# Altium PCB ChargeContactBoard.PcbDoc
Units mil, origin at the board's own origin, x right, y up, seen from the top; angles counter-clockwise.
Board outline 464.57 x 1370.12 mil, 2 copper layers (Top Layer, Bottom Layer); 2 components, 2 nets, 7 pads, 2 vias.
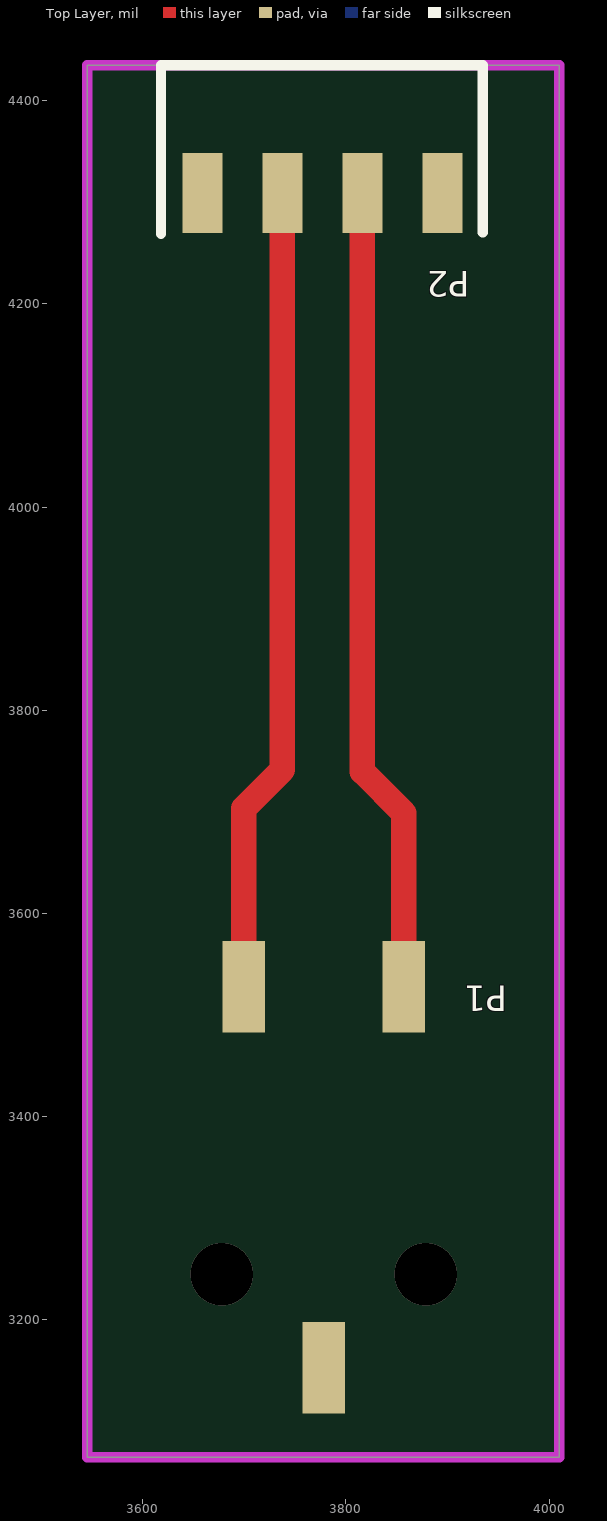
[diagram p0: Top Layer view]
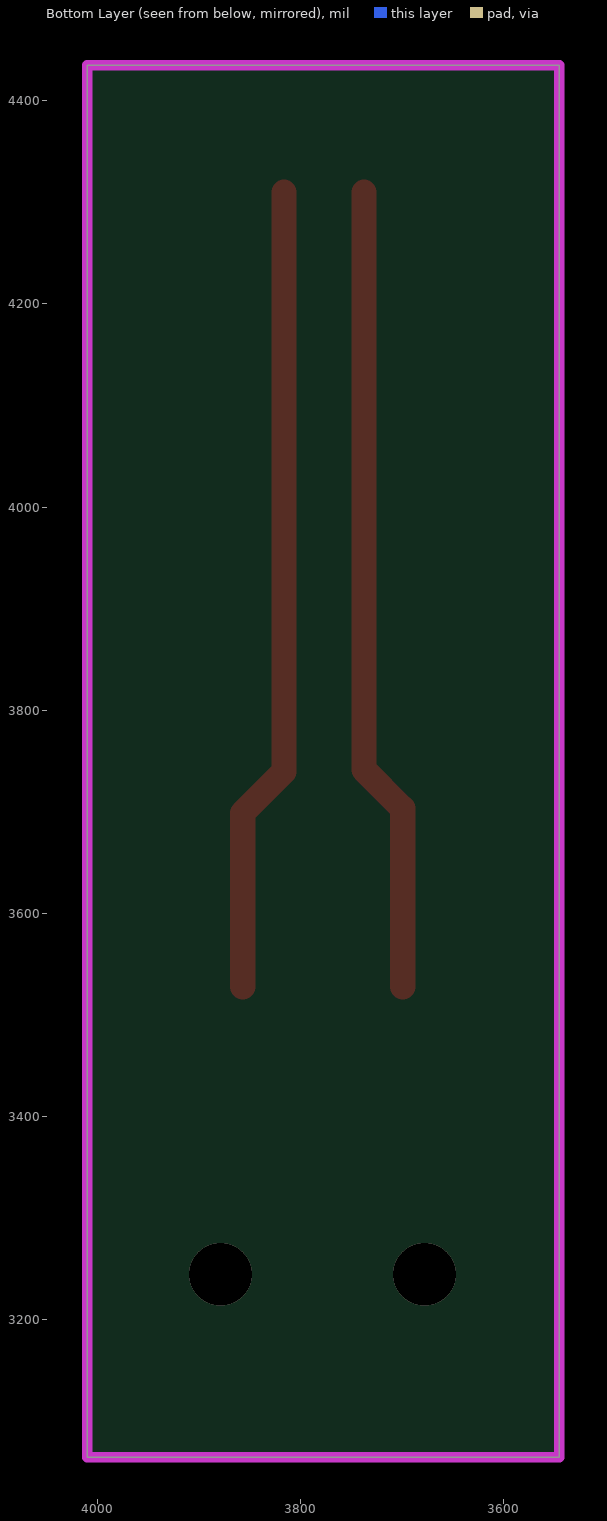
[diagram p1: Bottom Layer view, seen from below]

## Layer stack, top to bottom
Top Layer: signal copper 1.4
Dielectric: dielectric 12.6, FR-4, Dk 4.8
Bottom Layer: signal copper 1.4

## Board outline
3545.43,3064.88 3545.43,4435 4010,4435 4010,3064.88

## Design rules (kind name [scope] priority, off if disabled: settings)
Clearance [All] p1: gap=10
PolygonConnect [All] p1: connectstyle=Relief reliefconductorwidth=10 reliefentries=4 polygonreliefangle="90 Angle"
RoutingVias [All] p1: holewidth=28 width=50 viastyle="Through Hole" minholewidth=28 minwidth=50 maxholewidth=28 maxwidth=50
SilkscreenOverComponentPads [All] p1: minsilkscreentomaskgap=10
SolderMaskExpansion [All] p1: expansion=4
Width [All] p1: maxlimit=50 minlimit=6 preferedwidth=10
27 further rules are at their usual default settings.

## Components (designator, comment, footprint, x,y, rotation, side; value= is the part's Value field where it differs from the comment)
P1 "Header 2" "Modular 2pin contact" 3857,3528 r180 top
P2 "Header 2" "Charger Board Connector Male" 3895,4309 r180 top

## Footprints (in the part's own frame and the unit in brackets; to place one, negate y for a bottom-side part, rotate by r counter-clockwise, add the part's x,y. Pads: shape width x height; smd on the part's side, far side on the other; paste and mask are expansions set on the pad)
"Charger Board Connector Male" [mm]
  rect 1x2 smd: 1(0,0) 2(2,0) 3(4,0) 4(6,0)
  silkscreen extent -1.01,-3.2 7.04,1.01
"Modular 2pin contact" [mm]
  rect 1.07x2.29 smd: 1(0,0) 2(4,0) ""(2,9.53)

## Part data
P1 P2: "Header, 2-Pin"

## Via types
v1: diameter 61.81, hole 61.81, Top Layer to Bottom Layer, 2 vias

## Nets (pads, with @x,y where several pads share a name; then routed paths per layer and width w, separated by ;. In a path a pad name is that pad's centre, name@x,y a point inside that pad or via, vN(x,y) a via of type N, cw(c..) or ccw(c..) an arc to the next point about the centre after c; other vN are vias at no path point)
5V: P1.2 P2.3 | length 797.7
  Top Layer w25: P1.2 3699.52,3703.52 3737.52,3741.52 P2.3@3737.52,4310
GND: P1.1 P2.2 | length 798.9
  Top Layer w25: P2.2@3816.26,4310 3816.26,3739.74 3857,3699 P1.1
pads on no net: P1. P2.1 P2.4
copper on no net:
  other v1: 3677.87,3244.93 3878.65,3244.93

## Keep-outs
Keep-Out Layer:
  the board outline again, w10